# Altium PCB TIDA-01485.PcbDoc (part 2 of 2)
Units mil, origin at the board's own origin, x right, y up, seen from the top; angles counter-clockwise.
Board outline 1417.32 x 1968.5 mil, 4 copper layers (Top Layer, GND, PWR, Bottom Layer), stack 79.834 mil thick; 108 components, 78 nets, 395 pads, 443 vias.
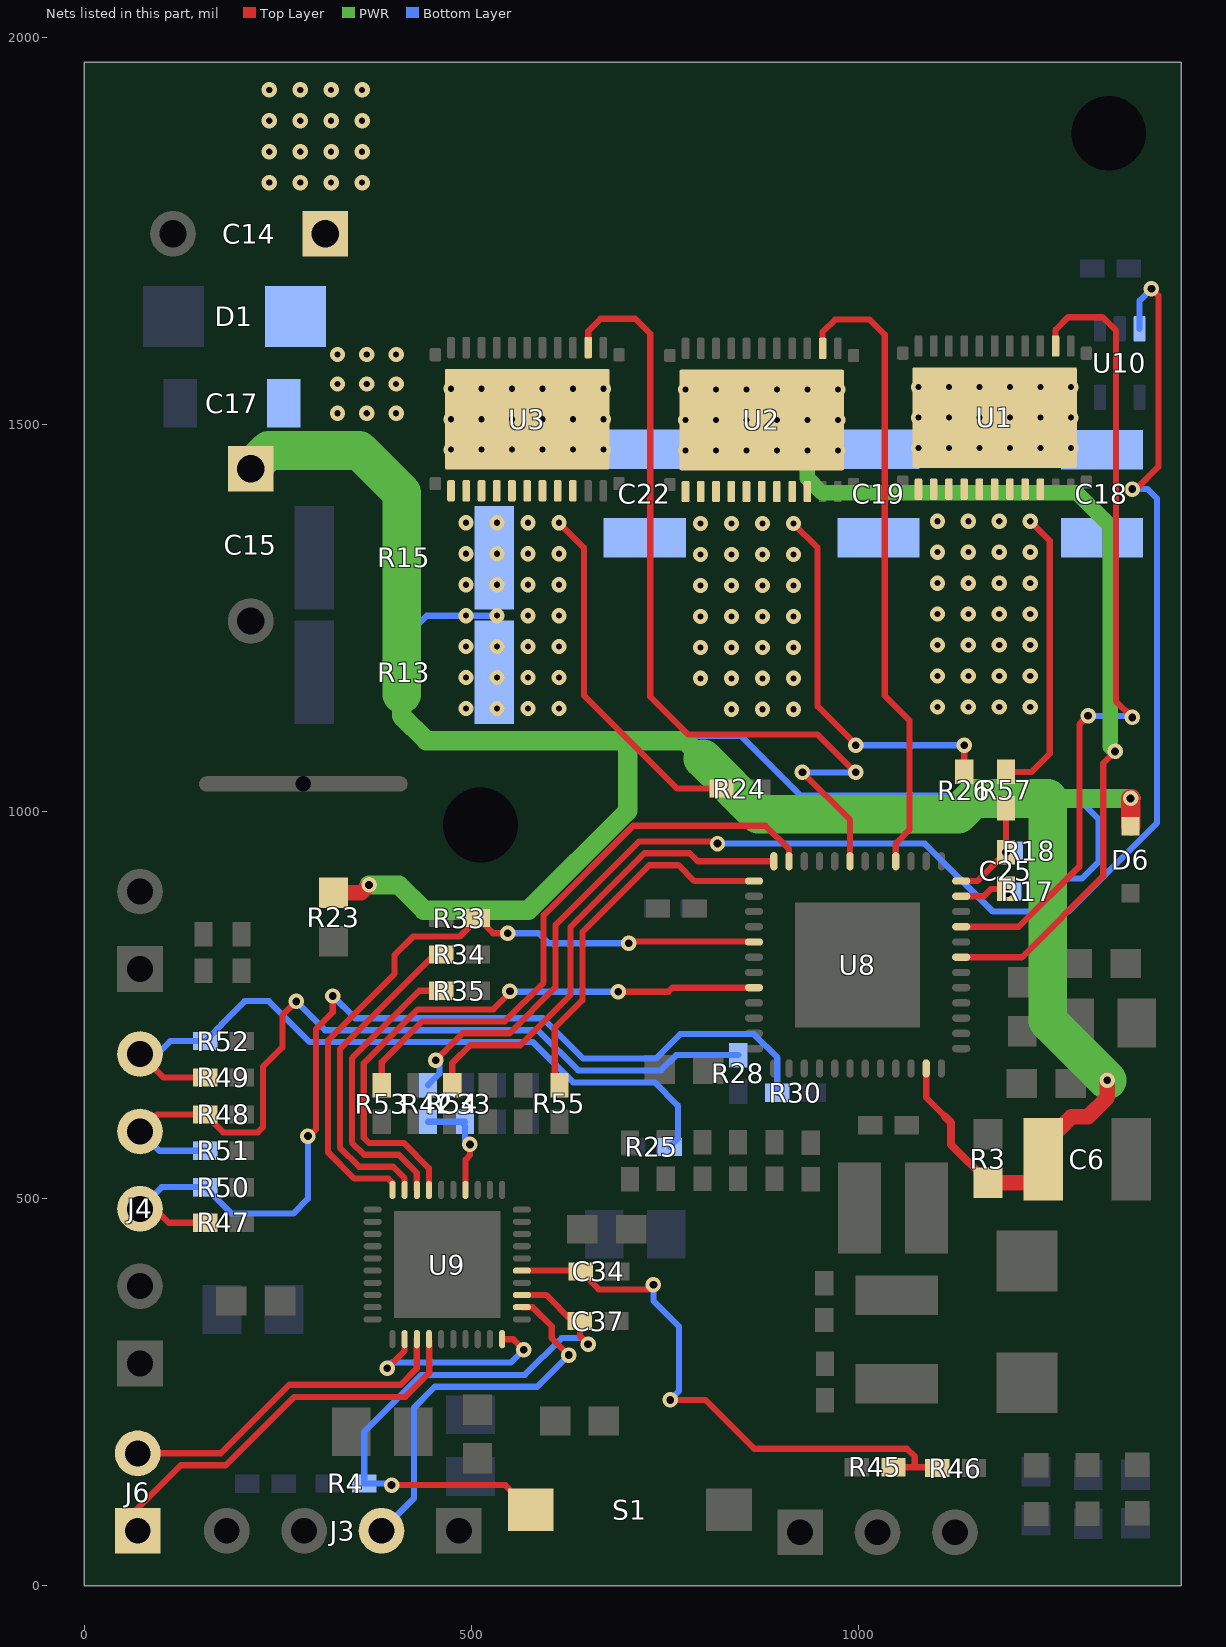
[diagram p4: the nets of this part, all layers, seen from the top]

## Via types
v1: diameter 19.68, hole 7.87, Top Layer to Bottom Layer, 328 vias
v2: diameter 20, hole 10, Top Layer to Bottom Layer, tented both sides, 115 vias

## Nets (pads, with @x,y where several pads share a name; then routed paths per layer and width w, separated by ;. In a path a pad name is that pad's centre, name@x,y a point inside that pad or via, vN(x,y) a via of type N, cw(c..) or ccw(c..) an arc to the next point about the centre after c; other vN are vias at no path point) (continued)
NetR42_2: R42.2 U10.3 | length 2024.6
  Top Layer w8: v2(454,679) 488.8,713.8 549.58,713.8 608.8,773.02 608.8,853.36 717.24,961.8 v2@821.8,961.8 ; v2@1351.12,1419.88 v2(1354,1417) 1359,1417 1387.92,1445.92 1387.92,1667.08 v2(1379,1676)
  Bottom Layer w8: R42.2@444,646.62 458.81,661.43 458.81,674.19 v2(454,679) ; v2@453,679 v2@453,681 ; v2(818.19,959) 1086.2,959 1174.2,871 1271.66,871 1386,985.34 1386,1405 1374,1417 v2(1354,1417) ; U10.3@1363.59,1624.29 1363.59,1660.59 v2(1379,1676)
NetR53_1: R53.1 U8.23 | length 761.7
  Top Layer w8: R53.1@384.35,646.62 384.35,676.61 436.94,729.2 543.2,729.2 593.4,779.4 593.4,866.4 709,982 880.05,982 910.7,951.35 U8.23@910.7,936.15
NetR54_1: R54.1 U8.24 | length 612.3
  Top Layer w8: R54.1@475.35,646.62 475.35,670.08 475.4,670.14 475.4,675.4 498.4,698.4 563.4,698.4 572.2,707.2 ; 572.24,707.2 593.8,728.76 ; 593.8,728.8 628.2,763.2 628.2,850.98 723.62,946.4 782.38,946.4 792.63,936.15 U8.24@891.02,936.15
NetR55_1: R55.1 U8.25 | length 481.3
  Top Layer w8: R55.1@614,646.62 608,652.62 608,721 643.6,756.6 643.6,844.6 730,931 768,931 788.44,910.56 U8.25@865.43,910.56
OC_FLT: U9.22 U9.30 | length 263.2
  Top Layer w8: v2(391.47,281) 413.88,303.41 U9.22@413.88,318.54 ; U9.30@539.87,318.54 554.46,318.54 v2(568,305)
  Bottom Layer w8: v2@393.63,285 397.13,288.5 551.5,288.5 v2(568,305)
PVDD: C6.1 C14.1 C15.1 C17.1 C18.1 C19.1 C22.1 D1.2 D6.2 R3.2 R23.2 U1.27 U2.27 U3.27 U8.7 U8.47 | length 4106
  Top Layer w8: U8.47@1087.87,668.43 1087.87,630.63 1112.25,606.25 ; U8.7@1133.15,812.13 1211.77,812.13 1316.8,917.16 1316.8,1062.8 v2(1332,1078)
  Top Layer w10: 1112.25,606.25 1120,598.5 1120,570 1168,522 R3.2@1168,520.5
  Top Layer w20: R23.2@322,895.5 358,895.5 v2(368,905.5) ; R3.2@1168,520.5 1238.91,520.5 C6.1@1238.91,551 1238.91,569.5 1275.41,606 1297,606 1322,631 v2(1322,653)
  Top Layer w25: D6.2@1352,981.31 v2(1352,1017.3)
  PWR w20: v1(934.41,1506.33) v1(934.41,1466.96) 934.41,1431 953.41,1412 1283,1412 1326,1369 1326,1084 v2(1332,1078)
  PWR w25: v2(368,905.5) 406.29,905.5 438.79,873 574,873 702.19,1001.19 702.19,1088.19 706,1092 ; 410,1152 410,1124 442,1092 706,1092 ; 799.5,1068.5 776,1092 706,1092 ; 1245,1017.3 v2(1352,1017.3)
  PWR w50: C15.1@215,1443.43 238.57,1467 355,1467 410,1412 410,1152 ; 799.5,1068.5 871,997 1129,997 1149.3,1017.3 1245,1017.3 1245,730 v2(1322,653)
  other v1: 776.93,1466.96 816.3,1466.96 855.67,1466.96 895.04,1466.96 973.78,1466.96 473.93,1467.96 513.3,1467.96 552.67,1467.96 592.04,1467.96 631.41,1467.96 670.78,1467.96 1077.93,1469.96 1117.3,1469.96 1156.67,1469.96 1196.04,1469.96 1235.41,1469.96 1274.78,1469.96 776.93,1506.33 816.3,1506.33 855.67,1506.33 895.04,1506.33 973.78,1506.33 473.93,1507.33 513.3,1507.33 552.67,1507.33 592.04,1507.33 631.41,1507.33 670.78,1507.33 1077.93,1509.33 1117.3,1509.33 1156.67,1509.33 1196.04,1509.33 1235.41,1509.33 1274.78,1509.33 327,1515 365,1515 403,1515 776.93,1545.7 816.3,1545.7 855.67,1545.7 895.04,1545.7 934.41,1545.7 973.78,1545.7 473.93,1546.7 513.3,1546.7 552.67,1546.7 592.04,1546.7 631.41,1546.7 670.78,1546.7 1077.93,1548.7 1117.3,1548.7 1156.67,1548.7 1196.04,1548.7 1235.41,1548.7 1274.78,1548.7 327,1553 365,1553 403,1553 327,1591 365,1591 403,1591 239,1813 279,1813 319,1813 359,1813 239,1853 279,1853 319,1853 359,1853 239,1893 279,1893 319,1893 359,1893 239,1933 279,1933 319,1933 359,1933
RST: C37.1 R4.1 S1.2 U9.33 | length 766.8
  Top Layer w8: v2(397,130) 544.05,130 S1.2@577.05,97 ; U9.33@565.46,375.63 596.75,375.63 630.38,342 C37.1@640.38,342 640.38,322.62 v2(651,312)
  Bottom Layer w8: v2(397,130) 399,132 R4.1@361.62,132 361.62,198.62 435.4,272.4 569.4,272.4 617,320 643,320 v2(651,312)
SA: J4.5 R25.1 R49.1 R52.2 | length 934.2
  Top Layer w8: J4.5@72,687 102.19,656.81 R49.1@156.38,656.81
  Bottom Layer w8: J4.5@72,687 94,687 110.81,703.81 R52.2@156.38,703.81 171.19,718.62 171.19,718.92 177.4,725.14 177.4,725.66 207.14,755.4 238.34,755.4 291.34,702.4 579.78,702.4 631.78,650.4 736.86,650.4 767,620.26 767,577.38 R25.1@756.62,567
SB: J4.4 R28.1 R48.1 R51.2 | length 1071.6
  Top Layer w8: J4.4@72,587 94,609 R48.1@156.38,609 179.59,585.79 224.09,585.79 230.77,592.47 230.77,625.53 230.77,670.51 256,695.74 256,737 v2(274,755)
  Bottom Layer w8: J4.4@72,587 97,562 R51.2@156.38,562 ; v2(274,755) 311.2,717.8 586.16,717.8 638.16,665.8 744.8,665.8 764.62,685.62 R28.1@845,685.62
SC: J4.3 R30.1 R47.1 R50.2 | length 1298.2
  Top Layer w8: J4.3@72,487 91,487 109,469 R47.1@156.38,469 ; v2(289,581) 291,581 299.54,589.54 299.54,719.54 321,741 v2(321,762)
  Bottom Layer w8: J4.3@72,487 100,515 R50.2@156.38,515 190.57,480.81 270.08,480.81 289,499.74 v2(289,581) ; v2(321,762) 349.8,733.2 592.54,733.2 644.54,681.2 738.42,681.2 769.99,712.77 865.23,712.77 895.38,682.62 R30.1@895.38,637
SCLK: R35.2 U9.8 | length 382.9
  Top Layer w8: U9.8@429.63,511.46 429.63,533.59 406.39,556.83 361.43,556.83 345.74,572.53 345.74,681.56 432.83,768.65 R35.2@461.38,768.65
SCS: U8.32 U9.7 | length 776.7
  Top Layer w8: U9.7@445.38,511.46 445.38,539.62 412.77,572.23 367.81,572.23 361.14,578.91 361.14,675.18 430.56,744.6 528.6,744.6 550,766 v2(550,768) ; v2(690,767.6) 754.86,767.6 760.02,772.76 U8.32@865.43,772.76
  Bottom Layer w8: v2@545.6,766.05 548,768.45 548.45,768 v2(550,768) 550.4,767.6 v2(690,767.6)
SDI: R34.2 U9.9 | length 424
  Top Layer w8: U9.9@413.88,511.46 413.88,526.59 399.04,541.43 355.06,541.43 330.34,566.15 330.34,693.34 452.65,815.65 R34.2@461.38,815.65
SDO: R33.2 U8.29 U9.10 | length 902.1
  Top Layer w8: U9.10@398.13,511.46 398.13,520.56 392.67,526.03 348.68,526.03 314.94,559.77 314.94,704.67 401,790.74 401,815 424.86,838.86 484.83,838.86 R33.2@508.62,862.65 528.28,843 v2(547,843) ; v2@703,825 v2@705.72,827.72 ; v2(703.35,830.1) 705.65,832.4 864.84,832.4 U8.29@865.43,831.81
  Bottom Layer w8: v2(547,843) 587,843 599.9,830.1 v2(703.35,830.1)
SH_A: U1.2 U8.9 | length 1071.4
  Top Layer w8: U8.9@1133.15,851.5 1207.58,851.5 1286,929.92 1286,1113 v2(1297,1124) ; U1.2@1255.06,1601.85 1255.06,1623.07 1271.12,1639.13 1315.86,1639.13 1333,1621.99 1333,1143 v2(1354,1122)
  Bottom Layer w8: v2(1297,1124) 1358,1124 1356,1122 v2(1354,1122)
SH_B: U2.2 U8.16 | length 817.3
  Top Layer w8: U2.2@954.06,1598.85 954.06,1620.07 970.12,1636.13 1014.86,1636.13 1034.32,1616.67 1034.32,1149.89 1066.2,1118.01 1066.2,976.54 1048.5,958.84 U8.16@1048.5,936.15
SH_C: U3.2 U8.19 | length 1107
  Top Layer w8: U3.2@651.06,1599.85 651.06,1621.07 667.12,1637.13 711.86,1637.13 731.32,1617.67 731.32,1148.68 780,1100 947,1100 996,1051 v2(997,1051) ; v2(928,1051) 989.44,989.56 U8.19@989.44,936.15 ; v2@994.5,1048.5 v2@997,1046
  Bottom Layer w8: v2(928,1051) v2@930,1051 ; v2@928,1053 v2@930,1051 ; v2(997,1051) v2@930,1051
SL_A: C18.2 C19.2 C22.2 R13.1 R15.1 R17.2 R24.1 R26.1 R57.1 U1.12 U1.13 U1.14 U1.15 U1.16 U1.17 U1.18 U1.19 U1.20 U2.12 U2.13 U2.14 U2.15 U2.16 U2.17 U2.18 U2.19 U2.20 U3.12 U3.13 U3.14 U3.15 U3.16 U3.17 U3.18 U3.19 U3.20 | length 2665.3
  Top Layer w8: v1(613.32,1373.48) 645.5,1341.3 645.5,1150.5 766,1030 R24.1@823.38,1030 R24.1@827.38,1030 ; v1@916.32,1131.68 v1(916.32,1132.48) ; v1@916.32,1171.68 v1(916.32,1172.48) ; v1(916.32,1372.48) 947.5,1341.3 947.5,1136.5 v2@997,1087 ; R26.1@1137,1051.62 v2(1137,1086) ; R57.1@1191,1051.62 1224,1051.62 1247.5,1075.12 1247.5,1350.3 v1(1222.32,1375.48)
  Bottom Layer w8: v1(533.32,1253.48) v1(493.32,1253.48) 442.48,1253.48 415,1226 415,1118.34 435.34,1098 848.34,1098 925.54,1020.8 1280.54,1020.8 1310.8,990.54 1310.8,935.46 1289.34,914 1259.62,914 R17.2@1242.62,897 ; v2(997,1086) v2(1137,1086)
  other v1: 836.32,1132.48 876.32,1132.48 493.32,1133.48 533.32,1133.48 573.32,1133.48 613.32,1133.48 1102.32,1135.48 1142.32,1135.48 1182.32,1135.48 1222.32,1135.48 796.32,1172.48 836.32,1172.48 876.32,1172.48 493.32,1173.48 533.32,1173.48 573.32,1173.48 613.32,1173.48 1102.32,1175.48 1142.32,1175.48 1182.32,1175.48 1222.32,1175.48 796.32,1212.48 836.32,1212.48 876.32,1212.48 916.32,1212.48 493.32,1213.48 533.32,1213.48 573.32,1213.48 613.32,1213.48 1102.32,1215.48 1142.32,1215.48 1182.32,1215.48 1222.32,1215.48 796.32,1252.48 836.32,1252.48 876.32,1252.48 916.32,1252.48 573.32,1253.48 613.32,1253.48 1102.32,1255.48 1142.32,1255.48 1182.32,1255.48 1222.32,1255.48 796.32,1292.48 836.32,1292.48 876.32,1292.48 916.32,1292.48 493.32,1293.48 533.32,1293.48 573.32,1293.48 613.32,1293.48 1102.32,1295.48 1142.32,1295.48 1182.32,1295.48 1222.32,1295.48 796.32,1332.48 836.32,1332.48 876.32,1332.48 916.32,1332.48 493.32,1333.48 533.32,1333.48 573.32,1333.48 613.32,1333.48 1102.32,1335.48 1142.32,1335.48 1182.32,1335.48 1222.32,1335.48 796.32,1372.48 836.32,1372.48 876.32,1372.48 493.32,1373.48 533.32,1373.48 573.32,1373.48 1102.32,1375.48 1142.32,1375.48 1182.32,1375.48
SN1: C25.2 R18.1 R57.2 U8.12 | length 130
  Top Layer w8: U8.12@1133.15,910.56 1153.93,910.56 v2(1191,947.62) R57.2@1191,1004.38
SP1: C25.1 R17.1 U8.11 | length 61.8
  Top Layer w8: U8.11@1133.15,890.87 1162.22,890.87 1171.72,900.38 C25.1@1191,900.38
  other v2: 1193,895
SPEED_REF: C34.1 R45.1 R46.2 U9.35 | length 772.2
  Top Layer w8: U9.35@565.46,407.13 640.25,407.13 C34.1@641.38,406 664.59,382.79 729.36,382.79 v2(735.4,388.83) ; C34.1@641.38,413 C34.1@646.38,413 ; v2(757,240) 802.44,240 865.44,177 1063,177 1073,167 1073,153 ; R45.1@1045.62,153 1073,153 ; R46.2@1102.38,152 1101.38,153 1073,153
  Bottom Layer w8: v2(735.4,388.83) 735.4,368 768.4,335 768.4,251.4 v2(757,240)
TEMP_SENSE: C33.1 R42.1 U9.4 | length 139.5
  Top Layer w8: U9.4@492.62,511.46 492.62,550.62 498.35,556.35 v2(498.35,570.21)
  Bottom Layer w8: R42.1@444,599.38 C33.1@492,599.38 ; C33.1@489.58,596.96 492,594.54 492,576.56 v2(498.35,570.21)
TEST: J3.2 U9.32 | length 499.6
  Top Layer w8: U9.32@565.46,359.88 579.12,359.88 579.53,359.47 579.68,359.47 604,335.15 604,320 v2(626,298)
  Bottom Layer w8: J3.2@384,71 426,113 426,230 453,257 585,257 v2(626,298)
UART_RX: J6.1 U9.24 | length 521.9
  Top Layer w8: J6.1@69,71 69,100 124.6,155.6 182.6,155.6 271,244 414.78,244 445.73,274.95 445.73,315.84 445.38,316.19 U9.24@445.38,318.54
UART_TX: J6.2 U9.23 | length 444
  Top Layer w8: J6.2@69,171 176.22,171 264.82,259.6 408.6,259.6 429.63,280.63 U9.23@429.63,318.54
pads on no net: H1. H2. U1. U1.21 U1.23 U1.24 U1.25 U1.26 U2. U2.21 U2.23 U2.24 U2.25 U2.26 U3. U3.21 U3.23 U3.24 U3.25 U3.26 U8.14 U8.21 U9.31 U9.36

## Polygon pours and split planes (outlines as drawn)
3.3V on Top Layer "V" (solid, pour order 642): 1280,136 1378,136 1381,139 1381,174 1378,177 1350,177 1333,194 1316,194 1312,190 1312,179 1309,176 1275,176 1273,174 1273,139 1276,136
GND on Top Layer "V" (solid, remove dead copper, pour order 618): 161,1945 44,1945 36.5,1937.5 36.5,1138 63.5,1111 70.5,1104 319,1104 325,1110 325,1393.27 321.27,1397 272,1397 261,1386 183,1386 172,1397 172,1934
3.3V on Top Layer "V" (solid, pour order 561): 973,548 973,461.82 931,419.82 931,380 936.87,374.13 985.87,374.13 991,369 991,338 996,333 1137,333 1142,338 1142,389 1136.09,394.91 1122,409 1100.95,409 1034.52,409 1027,416.52 1027,546 1021,552 976,552 973,549
NetC9_1 on Top Layer "V" (solid, pour order 553): 1197,757 1246,757 1251,752 1251,694 1253,692 1306,692 1309,695 1309,844 1336,871 1373,871 1378,876 1378,910 1374,914 1341,914 1229,802 1204,802 1196,802 1193.3,799.3 1193.3,760.7
SL_A on Top Layer "Bottom Layer-No Net 1" (solid, remove dead copper, pour order 409): 630,1428.51 472.17,1428.51 469.17,1425.51 469.16,1119.84 475.67,1113.33 619.33,1113.33 630,1124
SL_A on Top Layer "Bottom Layer-No Net 1" (solid, remove dead copper, pour order 415): 933,1427.51 775.17,1427.51 772.17,1424.51 772.16,1131.84 788,1116 921,1116 933,1128
PVDD on Top Layer "V" (solid, pour order 517): 206,1415 209,1412 258,1412 288.5,1442.5 481,1442.5 1310,1442.5 1313,1445.5 1313,1566.5 1306,1573.5 439.5,1573.5 403,1610 403,1927 382,1948 221,1948 206,1933
MW on Top Layer "V" (solid, remove dead copper, pour order 569): 425,1929 425,1658.09 467,1616.09 467,1587 470,1584 635,1584 638,1587 638,1644 650.5,1656.5 682,1688 682,1727 682,1931 668,1945 441,1945 425,1929
MV on Top Layer "V" (solid, remove dead copper, pour order 573): 708,1931 708,1677.09 770,1615.09 770,1586 773,1583 938,1583 941,1586 941,1643 959,1661 959,1928 943,1944 721,1944
MU on Top Layer "V" (solid, pour order 575): 1156,1586 1239,1586 1260,1607 1260,1783 1236,1807 1216,1827 1216,1871 1216,1941 1211,1946 992,1946 980,1934 980,1709.09 1029,1660.09 1071,1618.09 1071,1613.66 1071,1589 1074,1586
GND on Top Layer "V" (solid, remove dead copper, pour order 644): 1372,1096 676,1096 553,973 221,973 47,973 20,946 20,44 41,23 1373.32,23 1393.32,43 1393.32,1074.68
SL_A on Top Layer "Bottom Layer-No Net 1" (solid, remove dead copper, pour order 411): 1234,1430.51 1076.17,1430.51 1073.17,1427.51 1073.16,1131.84 1089.67,1115.33 1222.33,1115.33 1234,1127
GND on Bottom Layer "V" (solid, pour order 634): 36.5,1142 36.5,741.5 46,732 178,732 178,942 130,990 130,1064 175,1109 175,1142
GND on Bottom Layer "V" (solid, remove dead copper, pour order 632): 1372,1096 676,1096 553,973 221,973 47,973 20,946 20,44 41,23 1373.32,23 1393.32,43 1393.32,1074.68
SL_A on Bottom Layer "Bottom Layer-No Net" (solid, remove dead copper, pour order 399): 490,1397 1360,1397 1371,1386 1371,1132 1352.33,1113.33 490.67,1113.33 483,1121 483,1390
GND on Bottom Layer "V" (solid, remove dead copper, pour order 405): 161,1945 44,1945 36.5,1937.5 36.5,1138 63.5,1111 70.5,1104 319,1104 325,1110 325,1393.27 321.27,1397 272,1397 261,1386 183,1386 172,1397 172,1934
MW on Bottom Layer "V" (solid, pour order 577): 441,1945 425,1929 425,1709 434,1700 669,1700 682,1713 682,1931 668,1945
MV on Bottom Layer "V" (solid, pour order 579): 721,1944 708,1931 708,1714 720,1702 722,1700 723,1700 949,1700 959,1710 959,1928 943,1944
PVDD on Bottom Layer "V" (solid, remove dead copper, pour order 583): 384.16,1945.84 218.84,1945.84 206,1933 206,1495 184,1473 184,1416 188,1412 258,1412 288.5,1442.5 1374.5,1442.5 1380,1448 1380,1559 1263,1676 421,1676 403,1694 403,1927
MU on Bottom Layer "V" (solid, pour order 610): 991.84,1945.84 980,1934 980,1710 980,1709 988,1701 989,1700 1253,1700 1260,1707 1260,1783 1216,1827 1216,1941 1211.16,1945.84
GND on GND "V" (solid, pour order 636): 36.5,1142 36.5,741.5 46,732 178,732 178,942 130,990 130,1064 175,1109 175,1142
SL_A on GND "Bottom Layer-No Net" (solid, remove dead copper, pour order 626): 490,1397 1360,1397 1371,1386 1371,1132 1352.33,1113.33 490.67,1113.33 483,1121 483,1390
GND on GND "V" (solid, remove dead copper, pour order 620): 161,1945 44,1945 36.5,1937.5 36.5,1138 63.5,1111 70.5,1104 319,1104 325,1110 325,1393.27 321.27,1397 272,1397 261,1386 183,1386 172,1397 172,1934
GND on GND "V" (solid, remove dead copper, pour order 606): 1372,1096 676,1096 553,973 221,973 47,973 20,946 20,44 41,23 1373.32,23 1393.32,43 1393.32,1074.68
PVDD on GND "V" (solid, remove dead copper, pour order 604): 384.16,1945.84 218.84,1945.84 206,1933 206,1495 184,1473 184,1416 188,1412 258,1412 288.5,1442.5 1374.5,1442.5 1380,1448 1380,1591 1295,1676 421,1676 403,1694 403,1927
MU on GND "V" (solid, pour order 587): 991.84,1945.84 980,1934 980,1710 980,1709 988,1701 989,1700 1253,1700 1260,1707 1260,1783 1216,1827 1216,1941 1211.16,1945.84
MV on GND "V" (solid, pour order 589): 721,1944 708,1931 708,1714 720,1702 722,1700 723,1700 949,1700 959,1710 959,1928 943,1944
MW on GND "V" (solid, pour order 591): 441,1945 425,1929 425,1709 434,1700 669,1700 682,1713 682,1931 668,1945
3.3V on PWR "V" (solid, pour order 640): 57,11 1386,11 1408,33 1408,993 1369,1032 701,1032 587,918 563,894 557,894 472,894 465,901 429,937 413,937 339,1011 290,1011 74,1011 33,970 33,33 55,11
SL_A on PWR "Bottom Layer-No Net" (solid, remove dead copper, pour order 628): 490,1397 1360,1397 1371,1386 1371,1132 1352.33,1113.33 490.67,1113.33 483,1121 483,1390
GND on PWR "V" (solid, remove dead copper, pour order 622): 161,1945 44,1945 36.5,1937.5 36.5,1138 63.5,1111 70.5,1104 319,1104 325,1110 325,1393.27 321.27,1397 272,1397 261,1386 183,1386 172,1397 172,1934
NetC27_1 on PWR "V" (solid, pour order 563): 220,416 220,343 334,229 367,196 536.54,196 654,196 713.43,255.43 713.43,495.39 688.82,520 644,520 639,515 552,428 323,428 224,428 220,424
PVDD on PWR "V" (solid, remove dead copper, pour order 585): 384.16,1945.84 218.84,1945.84 206,1933 206,1495 184,1473 184,1416 188,1412 258,1412 288.5,1442.5 1374.5,1442.5 1380,1448 1380,1591 1295,1676 421,1676 403,1694 403,1927
MV on PWR "V" (solid, pour order 595): 721,1944 708,1931 708,1714 720,1702 722,1700 723,1700 949,1700 959,1710 959,1928 943,1944
MW on PWR "V" (solid, pour order 597): 441,1945 425,1929 425,1709 434,1700 669,1700 682,1713 682,1931 668,1945
MU on PWR "V" (solid, pour order 608): 991.84,1945.84 980,1934 980,1710 980,1709 988,1701 989,1700 1253,1700 1260,1707 1260,1783 1216,1827 1216,1941 1211.16,1945.84
MW on Top Solder "V" (solid): 441,1945 425,1929 425,1709 434,1700 669,1700 682,1713 682,1931 668,1945
MV on Top Solder "V" (solid): 721,1944 708,1931 708,1714 720,1702 722,1700 723,1700 949,1700 959,1710 959,1928 943,1944
MU on Top Solder "V" (solid): 991.84,1945.84 980,1934 980,1710 980,1709 988,1701 989,1700 1253,1700 1260,1707 1260,1783 1216,1827 1216,1941 1211.16,1945.84
SL_A on Top Solder "Bottom Layer-No Net 1" (solid): 630,1428.51 472.17,1428.51 469.17,1425.51 469.16,1119.84 475.67,1113.33 619.33,1113.33 630,1124
SL_A on Top Solder "V" (solid): 787.69,1116.31 780.31,1123.69 780.31,1370.97 772.17,1379.12 772.17,1422.86 776.35,1427.04 929.3,1427.04 933,1423.35 933,1128 921.31,1116.31
SL_A on Top Solder "V" (solid, pour order 646): 1077.35,1430.51 1073.51,1430.51 1072,1429 1072,1374.96 1081.27,1365.69 1082.51,1364.45 1082.51,1359.45 1082.51,1122.49 1089.67,1115.33 1222.33,1115.33 1234,1127 1234,1430.51
MU on Bottom Solder "V" (solid): 991.84,1945.84 980,1934 980,1710 980,1709 988,1701 989,1700 1253,1700 1260,1707 1260,1783 1216,1827 1216,1941 1211.16,1945.84
PVDD on Bottom Solder "V" (solid): 258,1412 288,1442 1374,1442 1380,1448 1380,1490 1371,1499 1294,1499 1289,1504 1289,1583 1266,1606 1196,1676 1167,1676 421,1676 403,1694 403,1927 384,1946 219,1946 206,1933 206,1495 184,1473 184,1416 188,1412
GND on Bottom Solder "V" (solid): 161,1945 44,1945 36.5,1937.5 36.5,1138 63.5,1111 70.5,1104 319,1104 325,1110 325,1393.27 321.27,1397 272,1397 261,1386 183,1386 172,1397 172,1934
SL_A on Bottom Solder "V" (solid): 476.32,1393.33 462.32,1379.33 462.32,1120.33 469.32,1113.33 1234.33,1113.33 1265,1144 1283,1162 1358,1162 1362,1162 1371,1171 1371,1386 1363.67,1393.33 476.32,1393.33 462.32,1379.33
MV on Bottom Solder "V" (solid): 721,1944 708,1931 708,1714 720,1702 722,1700 723,1700 949,1700 959,1710 959,1928 943,1944
MW on Bottom Solder "V" (solid): 441,1945 425,1929 425,1709 434,1700 669,1700 682,1713 682,1931 668,1945

## Keep-outs
Keep-Out Layer:
  circle w6: c512,983 r83.5
  circle w6: c1324,1877 r83.5
  lines w6: 15,15 15,1954 1402.32,1954 1402.32,15 15,15
  text ".Layer_Name" at -885.15,-1620.64 h60

## Other copper
Top Layer:
  text ".layer_Name" at -870.15,-1610.15 h60
GND:
  pour cut-out: 978.32,552 1115,552 1119,548 1119,434 1109,424 976,424 972,428 972,545.68
  text "GND" at -850.15,-1620.15 h60
PWR:
  pour cut-out: 978.32,552 1115,552 1119,548 1119,434 1109,424 976,424 972,428 972,545.68
  text "PWR" at -812.15,-1627.15 h60
Bottom Layer:
  pour cut-out: 325,1241 365,1241 386,1220 386,1102 422,1066 831,1066 909,988 1217,988 1223,982 1223,933 1232,924 1277,924 1301.4,948.4 1301.4,982 1271.4,1012 919,1012 845,1086 434.38,1086 406,1114.38 406,1234 379,1261 325,1261
  pour cut-out: 978.32,552 1115,552 1119,548 1119,434 1109,424 976,424 972,428 972,545.68
  text ".Layer_Name" at -811.15,-1620.15 h60

## Silkscreen, mask and mechanical layers (free items; w line width, h text height)
Top Overlay:
  lines w6: 523,573 523,556 530,549 540,549 ; 760,493 760,500 ; 1002,420 1078,420 ; 1003,557 1078,557 ; 1121,422 1127,416 ; 1303,637 1320,637
  text "MV" at 842,1669 h25
  text "MW" at 532,1667 h25
  text "MU" at 1134,1667 h25
  text "LED" at 1320,190 h25 r90
  text "FAULT" at 1381.97,190 h25 r90
  text "3.3V" at 1181,184 h25
  text ".layer_Name" at -844.15,-1608.15 h60
Bottom Overlay:
  text "GND" at 9,868 h25 r270
  text "DIR" at 8,766 h25 r270
  text "HA" at 9,671 h25 r270
  text "HB" at 8,569 h25 r270
  text "HC" at 8,466 h25 r270
  text "GND" at 8,354 h25 r270
  text "3.3V" at 7,234 h25 r270
  text "TX" at 7,150 h25 r270
  text "RX" at 7,54 h25 r270
  text "GND" at 216,9 h25
  text "TEST" at 432,9 h25
  text "RST" at 315,8 h25
  text "3.3V" at 532,8 h25
  text "3.3V" at 967,7 h25
  text "POT" at 1058,7 h25
  text "GND" at 1161,7 h25
  text ".Layer_Name" at -885.15,-1620.64 h60
Top Paste:
  text ".Layer_Name" at -897.15,-1623.64 h60
Bottom Paste:
  text ".Layer_Name" at -897.15,-1623.64 h60
Top Solder:
  text ".Layer_Name" at -869.15,-1631.15 h60
Bottom Solder:
  text ".Layer_Name" at -822.15,-1627.15 h60
M1 Board Outline:
  the board outline again, w6
M2 Board Dimensions:
  rectangle: -867.65,-767.15 -492.65,-642.15
  rectangle: -992.65,-642.15 -867.65,-517.15
  lines w7: -992.65,-642.15 7.35,-642.15 ; -867.65,-767.15 -867.65,-517.15 ; -742.65,-767.15 -742.65,-517.15 ; -492.65,-767.15 -492.65,-517.15 ; -242.65,-767.15 -242.65,-517.15 ; -992.65,-767.15 -992.65,-517.15 7.35,-517.15 7.35,-767.15 -992.65,-767.15
  lines w10: -992.65,-832.15 -992.65,-812.15 ; -932.65,-842.15 -992.65,-822.15 ; -932.65,-802.15 -992.65,-822.15 ; -768.57,-822.15 -992.65,-822.15 ; -216.73,-822.15 7.35,-822.15 ; -52.65,-842.15 7.35,-822.15 ; -52.65,-802.15 7.35,-822.15 ; 7.35,-832.15 7.35,-812.15
  text "1000 (mil)" at -758.57,-858.14 h60
M3 3D STEP Top:
  text ".Layer_Name" at -885.15,-1620.64 h60
M4 3D STEP Bottom:
  text ".Layer_Name" at -885.15,-1620.64 h60
M5 Assembly Top:
  circle w6: c67,287 r15
  circle w6: c482,70 r15
  circle w10: c61,73 r19.24
  circle w10: c70,792 r19.24
  circle w10: c922,71 r19.24
  lines w8: -1754.15,-1692.32 4845.85,-1692.32 ; -1754.15,-1488.98 4847.85,-1488.98 ; -1754.15,-1285.65 -1754.15,-1895.65 2250.85,-1895.65 4847.85,-1895.65 4847.85,-1285.65 -1753.65,-1285.65 -1753.65,-1895.65 ; 710.85,-1895.65 710.85,-1285.65 ; 1977.85,-1488.98 1977.85,-1285.65 ; 2817.85,-1488.98 2817.85,-1285.65 ; 3439.85,-1902.15 3439.85,-1699.32
  text "COMPONENTS MARKED 'DNP' SHOULD NOT BE POPULATED." at -308.65,-1080.65 h25
  text "ASSEMBLY VARIANT:" at -309.15,-1196.15 h25
  text ".VariantName" at 726.85,-1196.15 h25
  text "ALL ARTWORK VIEWED FROM TOP SIDE" at -1690.65,-1417.82 h25
  text "BOARD #:" at 785.85,-1417.82 h25
  text ".PRJ_Number" at 1331.35,-1417.82 h25
  text "REV:" at 2175.85,-1417.82 h25
  text ".PCB_Rev" at 2467.35,-1417.82 h25
  text "SVN REV:" at 3013.85,-1417.82 h25
  text ".VersionControl_RevNumber" at 3519.85,-1417.82 h25
  text ".layer_Name" at -927.15,-1600.15 h60
  text "LAYER NAME =" at -1697.15,-1607.15 h25
  text ".TID" at 1181,-1617 h25
  text "TID #:" at 774.85,-1623.82 h25
  text ".plot_File_Name" at -1699.15,-1796.15 h25
  text "GENERATED    :" at 787.85,-1826.49 h25
  text ".Print_Date" at 1657.35,-1826.49 h25
  text ".Print_Time" at 2386.35,-1826.49 h25
  text "TEXAS INSTRUMENTS" at 3650.85,-1826.49 h25
M6 Assembly Bottom:
  circle w6: c1312.41,1643 r6.16
  lines w6: -1754.65,-1489.48 4847.35,-1489.48 ; -1752.65,-1692.82 4847.35,-1692.82 ; 275.35,-1489.48 275.35,-1286.15 ; 1115.35,-1489.48 1115.35,-1286.15 ; 2382.35,-1896.15 2382.35,-1286.15 ; 3271.35,-1896.15 4846.85,-1896.15 4846.85,-1286.15 -1754.65,-1286.15 -1754.65,-1896.15 842.35,-1896.15 4847.35,-1896.15 4847.35,-1286.15
  text "COMPONENTS MARKED 'DNP' SHOULD NOT BE POPULATED." at 4639.85,-1080.15 h25
  text ".VariantName" at 3595.85,-1196.15 h25
  text "ASSEMBLY VARIANT:" at 4634.85,-1196.15 h25
  text "SVN REV:" at 79.35,-1418.32 h25
  text ".PCB_Rev" at 625.85,-1418.32 h25
  text "REV:" at 917.35,-1418.32 h25
  text ".PRJ_Number" at 1761.85,-1418.32 h25
  text "BOARD #:" at 2307.35,-1418.32 h25
  text "PCB VIEWED FROM BOTTOM SIDE" at 4783.85,-1418.32 h25
  text ".TIDA" at 1908,-1601 h25
  text "LAYER NAME =" at 4778.85,-1603.15 h25
  text "TID #:" at 2314.15,-1607.82 h25
  text ".Layer_Name" at 4005.85,-1610.15 h60
  text ".Print_Time" at 706.85,-1826.99 h25
  text ".Print_Date" at 1435.85,-1826.99 h25
  text "GENERATED    :" at 2305.35,-1826.99 h25
  text ".plot_File_Name" at 3978.35,-1826.99 h25
  text "PLOT NAME =" at 4783.85,-1826.99 h25
M9 Title Sheet:
  drawing of 57 lines, arcs and shapes, not listed
  text "1" at -722.31,7274.35 h70
  text "2" at 1773.35,7274.35 h70
  text "3" at 4262.69,7274.35 h70
  text "4" at 6769.36,7274.35 h70
  text "5" at 9268.35,7274.35 h70
  text "6" at 11773.35,7274.35 h70
  text "A" at -1878.65,6131.35 h70
  text "A" at 12921.35,6131.35 h70
  text "B" at -1878.65,3751.35 h70
  text "B" at 12921.35,3751.35 h70
  text "C" at -1878.65,1376.35 h70
  text "C" at 12921.35,1376.35 h70
  text "PROJECT TITLE:" at 9881.35,-484.65 h45
  text ".PRJ_Title" at 10033.85,-619.15 h50
  text "DESIGNED FOR:" at 9881.35,-785.65 h45
  text ".PRJ_Customer" at 9931.35,-925.65 h70
  text "D" at -1878.65,-993.65 h70
  text "D" at 12921.35,-993.65 h70
  text "FILE NAME:" at 9881.35,-1085.65 h45
  text ".PCB_File_Name_No_Path" at 9931.35,-1205.65 h70
  text "Texas Instruments (TI) and/or its licensors do not warrant the accuracy or completeness of this specification" at 4911.85,-1367.49 h45
  text "ENGINEER:" at 9881.35,-1375.65 h45
  text "LAYOUT BY:" at 11386.35,-1375.65 h45
  text "or any information contained therein. TI and/or its licensors do not warrant that this design will meet" at 4866.86,-1480.15 h45
  text ".PRJ_Engineer" at 9931.35,-1530.64 h70
  text ".PCB_Layout" at 11436.85,-1530.64 h70
  text "the specifications, will be suitable for your application or fit for any particular purpose, or will operate in" at 4866.86,-1592.82 h45
  text "ALTIUM DESIGNER VERSION:" at 11386.35,-1685.65 h45
  text "an implementation. TI and/or its licensors do not warrant that the design is production worthy. You should" at 4866.86,-1705.48 h45
  text "completely validate and test your design implementation to confirm the system functionality for your application." at 4911.85,-1818.15 h45
  text ".print_Scale" at 9931.35,-1818.98 h70
  text ".Application_BuildNumber" at 11436.85,-1818.98 h70
  text "2" at 1773.35,-2025.65 h70
  text "3" at 4262.69,-2025.65 h70
  text "4" at 6769.36,-2025.65 h70
  text "5" at 9268.35,-2025.65 h70
  text "6" at 11773.35,-2025.65 h70
M10 Fab Notes:
  drawing of 228 lines, arcs and shapes, not listed
  text "DESIGN INFORMATION" at 10918.87,6047.85 h60
  text "(REFER ALSO ARRAY/PANEL PROFILING INFORMATION)" at 10557.31,5886.14 h60
  text "BOARD SIZE" at 9871.31,5881.85 h60
  text "36mm" at 10333.63,5754.03 h60
  text "X" at 10839.31,5754.03 h60
  text "50mm" at 11070.63,5754.03 h60
  text "Number of Layers :" at 10274.31,5556.85 h60
  text "4" at 11369.12,5546.85 h60
  text "MIN. TRACK WIDTH:" at 10274.31,5417.85 h60
  text "8" at 11370.55,5417.85 h60
  text "MIL" at 11525.31,5417.85 h60
  text "MIN. CLEARANCE:" at 10274.31,5285.85 h60
  text "MIL" at 11525.31,5285.85 h60
  text "7" at 11330.85,5282.85 h60
  text "MIN. VIA DRILL SIZE:" at 10274.31,5153.85 h60
  text "MIL" at 11525.31,5153.85 h60
  text "7.87" at 11270.85,5150.85 h60
  text "5.91 MIL" at 10969.31,5012.14 h60
  text "MINIMUM ANNULAR RING" at 9945.08,5007.86 h60
  text "EXTERNAL" at 11677.31,5007.86 h60
  text "PER" at 10145.08,4889.85 h60
  text "IPC-D-275 CLASS 2 LEVEL C" at 10365.08,4889.85 h60
  text "MIL, HOLES" at 11853.31,4777.56 h60
  text "+/-" at 11460.85,4776.85 h60
  text "+/-" at 12314.85,4776.85 h60
  text "REGISTRATION TOLERANCES:" at 9945.08,4771.85 h60
  text "METAL" at 11144.85,4771.85 h60
  text "5" at 11721.05,4771.85 h60
  text "3" at 12554.05,4771.85 h60
  text "MIL" at 12670.31,4771.85 h60
  text "MATERIAL:" at 9870.31,4562.39 h60
  text "FR-4 High Tg" at 10856.75,4422.06 h60
  text "X" at 10696.85,4414.85 h60
  text "FR-408" at 10291.31,4413.49 h60
  text "OTHER" at 11779.31,4413.49 h60
  text "63 MIL (1.6mm) +/-10%" at 10611.41,4250.77 h60
  text "THICKNESS:" at 9945.08,4246.49 h60
  text "X" at 10483.25,4246.49 h60
  text "OTHER" at 11896.31,4246.49 h60
  text "TOLERANCE:" at 9945.08,4088.49 h60
  text "X" at 10784.38,4088.49 h60
  text "ANSI IPC-6012 TYPE 3 CLASS 2" at 10971.33,4088.49 h60
  text "OTHER +/-" at 10971.31,3932.49 h60
  text "BOW & TWIST:" at 9945.08,3775.49 h60
  text "X" at 10784.38,3775.49 h60
  text "ANSI IPC-6012 TYPE 3 CLASS 2" at 10971.33,3775.49 h60
  text "OTHER +/-" at 10971.31,3616.98 h60
  text "COPPER THICKNESS (FINISHED):" at 9870.31,3481.49 h60
  text "1.4MIL (1oz)" at 10750.31,3328.77 h60
  text "2MIL (1.4oz)" at 11517.31,3328.77 h60
  text "2.8MIL (2oz)" at 12244.31,3328.77 h60
  text "X" at 12111.85,3326.85 h60
  text "OUTER:" at 10227.31,3324.49 h60
  text "1.4MIL (1oz)" at 10750.31,3171.77 h60
  text "2.8MIL (2oz)" at 11517.31,3171.77 h60
  text "N/A" at 12243.85,3172.14 h60
  text "X" at 11400.85,3168.85 h60
  text "INNER SIGNAL:" at 9938.23,3167.49 h60
  text "DRILLING:" at 9870.31,3028.49 h60
  text "REFERENCE:" at 9945.08,2911.49 h60
  text "X" at 10593.31,2911.49 h60
  text "AS SHOWN" at 10780.31,2911.49 h60
  text "X" at 11494.31,2911.49 h60
  text "NC_DRILL FILES" at 11631.31,2911.49 h60
  text "PTH MIN COPPER THICKNESS:" at 9945.08,2753.49 h60
  text "X" at 11295.31,2753.49 h60
  text "1MIL" at 11432.31,2753.49 h60
  text "OTHER" at 11929.31,2753.49 h60
  text "BOARD FINISH:" at 9870.31,2594.49 h60
  text "SILKSCREEN:" at 10025.53,2476.49 h60
  text "X" at 10974.31,2476.49 h60
  text "TOP" at 11100.31,2476.49 h60
  text "X" at 11484.31,2476.49 h60
  text "BOTTOM" at 11611.31,2476.49 h60
  text "SILKSCREEN COLOR:" at 10025.53,2309.49 h60
  text "X" at 10973.27,2309.49 h60
  text "WHITE" at 11100.31,2309.49 h60
  text "OTHER" at 11611.31,2309.49 h60
  text "SOLDER RESIST COLOR:" at 10025.53,2139.49 h60
  text "X" at 10593.27,1980.29 h60
  text "GREEN" at 10720.31,1980.29 h60
  text "BLUE" at 11311.31,1980.29 h60
  text "OTHER" at 11849.31,1980.29 h60
  text "IMMERSION GOLD (ENIG)" at 10931.31,1791.77 h60
  text "ENEPIG" at 12268.85,1788.49 h60
  text "SURFACE FINISH:" at 9870.31,1787.49 h60
  text "X" at 10744.36,1787.49 h60
  text "IMM. TIN/SILVER OR EQUIV" at 10199.85,1630.49 h60
  text "OTHER" at 11631.31,1630.49 h60
  text "ARRAY/PANEL:" at 9870.31,1451.49 h60
  text "CUT AND TRIM PER MECH LAYER 1" at 10931.31,1447.2 h60
  text "N.C. ROUTE" at 10931.31,1295.49 h60
  text "X" at 11610.31,1295.49 h60
  text "V. SCORE" at 11797.31,1295.49 h60
  text "CERTIFICATION:" at 9870.31,1158.49 h60
  text "MATERIALS AND WORKMANSHIP FOR ALL PCBS" at 10595.31,1158.49 h60
  text "TO MEET OR EXCEED THE REQUIREMENTS OF:" at 10595.31,1060.49 h60
  text "X" at 10221.81,923.99 h60
  text "ANSI IPC-A-600F CLASS ->" at 10360.81,923.99 h60
  text "X" at 11999.87,923.99 h60
  text "2" at 12118.81,923.99 h60
  text "1" at 11803.81,922.49 h60
  text "3" at 12472.81,922.49 h60
  text "X" at 10223.87,764.49 h60
  text "UL 94V-0" at 10360.81,764.49 h60
  text "X" at 11035.87,764.49 h60
  text "RoHS" at 11172.81,764.49 h60
  text "OTHER" at 11817.21,764.49 h60
  text "PER ORDER" at 12214.27,764.49 h60
  text "VIA TENTING:" at 11087.85,630.85 h60
  text "X" at 11846.31,626.49 h60
  text "ADDITIONAL REQUIREMENTS:" at 9870.31,623.49 h60
  text "YES" at 11637.52,621.77 h60
  text "NO" at 12002.32,616.54 h60
  text "MICROSECTION:" at 9945.08,508.49 h60
  text "YES" at 10850.81,508.49 h60
  text "IMPEDANCE CONTROL:" at 11109.85,501.85 h60
  text "YES" at 12093.85,500.85 h60
  text "X" at 12635.85,493.85 h60
  text "NO" at 12469.32,483.54 h60
  text "REQUIRED" at 11712.31,352.35 h60
  text "BARE BOARD ELEC. TEST:" at 9945.08,349.49 h60
  text "NONE" at 11250.81,349.49 h60
  text "X" at 11585.31,349.49 h60
  text "PER ORDER" at 12304.31,349.49 h60
  text "NOTE :" at 1720,298 h60
  text "Only 10 mil vias are tented , others are not tented." at 1982,196 h60
  text "MANUFACTURER'S UL:" at 9945.08,192.49 h60
  text "RAIL" at 11110.81,188.2 h60
  text "METAL" at 11602.62,188.2 h60
  text "X" at 11977.85,187.85 h60
  text "SILK" at 12114.31,188.2 h60
M11 Gerber Information:
  lines w8: -1754.15,-1692.32 4845.85,-1692.32 ; -1754.15,-1488.98 4847.85,-1488.98 ; -1754.15,-1285.65 -1754.15,-1895.65 2250.85,-1895.65 4847.85,-1895.65 4847.85,-1285.65 -1753.65,-1285.65 -1753.65,-1895.65 ; 710.85,-1895.65 710.85,-1285.65 ; 1977.85,-1488.98 1977.85,-1285.65 ; 2817.85,-1488.98 2817.85,-1285.65 ; 3439.85,-1902.15 3439.85,-1699.32
  text "BOARD #:" at 785.85,-1417.82 h60
  text ".PRJ_Number" at 1331.35,-1417.82 h60
  text "REV:" at 2175.85,-1417.82 h60
  text ".PCB_Rev" at 2467.35,-1417.82 h60
  text "SVN REV:" at 3013.85,-1417.82 h60
  text ".VersionControl_RevNumber" at 3519.85,-1417.82 h60
  text "ALL ARTWORK VIEWED FROM TOP SIDE" at -1691.65,-1423.82 h60
  text "LAYER NAME =" at -1693.15,-1607.15 h60
  text ".TID" at 1181,-1615 h60
  text "TID #:" at 774.85,-1621.82 h60
  text ".plot_File_Name" at -1701.15,-1806.15 h60
  text "GENERATED    :" at 787.85,-1826.49 h60
  text ".Print_Date" at 1657.35,-1826.49 h60
  text ".Print_Time" at 2386.35,-1826.49 h60
  text "TEXAS INSTRUMENTS" at 3650.85,-1826.49 h60
M12 Stackup:
  lines w6: 9897.85,6697.85 12447.85,6697.85 ; 9897.85,6802.25 12447.85,6802.25 ; 9837.85,6212.85 ccw(c9871.85,6212.85) 9871.85,6178.85 12473.85,6178.85 ccw(c12473.85,6212.85) 12507.85,6212.85 12507.85,6918.85 ccw(c12473.85,6918.85) 12473.85,6952.85 9871.85,6952.85 ccw(c9871.85,6918.85) 9837.85,6918.85 9837.85,6212.85
  text "Layer Stack Up Detail for: TIDA-01485-E1" at 9897.85,6834.95 h57
  text "Layer" at 9897.85,6763.25 h24
  text "Gerber" at 10793.66,6763.25 h24
  text "Copper" at 11357.18,6763.25 h24
  text "Dielectric" at 11959.89,6763.25 h24
  text "Name" at 9897.85,6715.25 h24
  text "Document" at 10793.66,6715.25 h24
  text "Thickness" at 11357.18,6715.25 h24
  text "Material" at 11959.89,6715.25 h24
  text "Top Solder Mask" at 9897.85,6622.29 h34
  text "(.GTS)" at 10793.66,6622.29 h34
  text "Solder Resist" at 11959.89,6622.29 h34
  text "Top Layer" at 9897.85,6525.54 h34
  text "(.GTL)" at 10793.66,6525.54 h34
  text "2.8mil" at 11357.18,6525.54 h34
  text "FR-4 High Tg" at 11988.85,6524.85 h34
  text "(.G1)" at 10793.66,6453.54 h34
  text "2.8mil" at 11359.18,6453.54 h34
  text "FR-4 High Tg" at 11989.85,6453.85 h34
  text "GND" at 9904.85,6451.85 h34
  text "(.G2)" at 10792.66,6381.54 h34
  text "FR-4 High Tg" at 11989.85,6379.85 h34
  text "2.8mil" at 11359.18,6370.54 h34
  text "PWR" at 9906.85,6366.85 h34
  text "FR-4 High Tg" at 11990.85,6305.85 h34
  text "Bottom Layer" at 9903.85,6295.85 h34
  text "(.GBL)" at 10801.85,6294.85 h34
  text "2.8mil" at 11361.85,6288.85 h34
  text "Solder Resist" at 11953.85,6221.85 h34
  text "(.GBS)" at 10798.85,6214.85 h34
  text "Bottom Solder Mask" at 9900.85,6209.85 h34
M13 Component Bodies Top:
  text ".Layer_Name" at -885.15,-1620.64 h60
M14 Component Bodies Bottom:
  text ".Layer_Name" at -885.15,-1620.64 h60
M15 Courtyards Top:
  text ".Layer_Name" at -885.15,-1620.64 h60
M16 Courtyards Bottom:
  text ".Layer_Name" at -885.15,-1620.64 h60
Drill Drawing:
  text ".legend" at 1990.23,915.31 h60
  text "Drill Table" at 1990.23,822.31 h60
  text "FOR 7.874MIL DRILL +0/-7.874MIL" at 1983.23,651.31 h60
  text "FOR 10MIL DRILL +0/-10MIL" at 1981.23,551.31 h60
  text "FOR PTH DRILL +/-3MIL" at 1983,470 h60
  text "FOR NPTH DRILL +/-2MIL" at 1982,377 h60
  text ".layer_Name" at -780.15,-1604.15 h60

## Dimensions
0,1968.5 to 0,0 on M2 Board Dimensions
0,0 to 1417.32,0 on M2 Board Dimensions

## Text inside footprints (layer, text, board x,y; h text height)
C14: Top Overlay "+" at 431,1691 h25 r180; M5 Assembly Top "+" at 361,1927 h25 r180
C15: Top Overlay "+" at 56,1554 h25 r270; M5 Assembly Top "+" at 335,1528 h25 r270
Logo3: Top Overlay "Pb" at 776.11,293.12 h60
ZZ1: M5 Assembly Top "Install label in silkscreened box after final wash.  Text shall be 8 pt font.  Text shall be per the Label Table in the PDF schematic." at -600,2991 h25